# Altium PCB Thumb.PcbDoc (part 1 of 2)
Units mm, origin at the board's own origin, x right, y up, seen from the top; angles counter-clockwise.
Board outline 100.7 x 63.21 mm, 4 copper layers (Top Layer, Plane 1, Plane 2, Bottom Layer), stack 0.781 mm thick; 93 components, 47 nets, 311 pads, 257 vias.
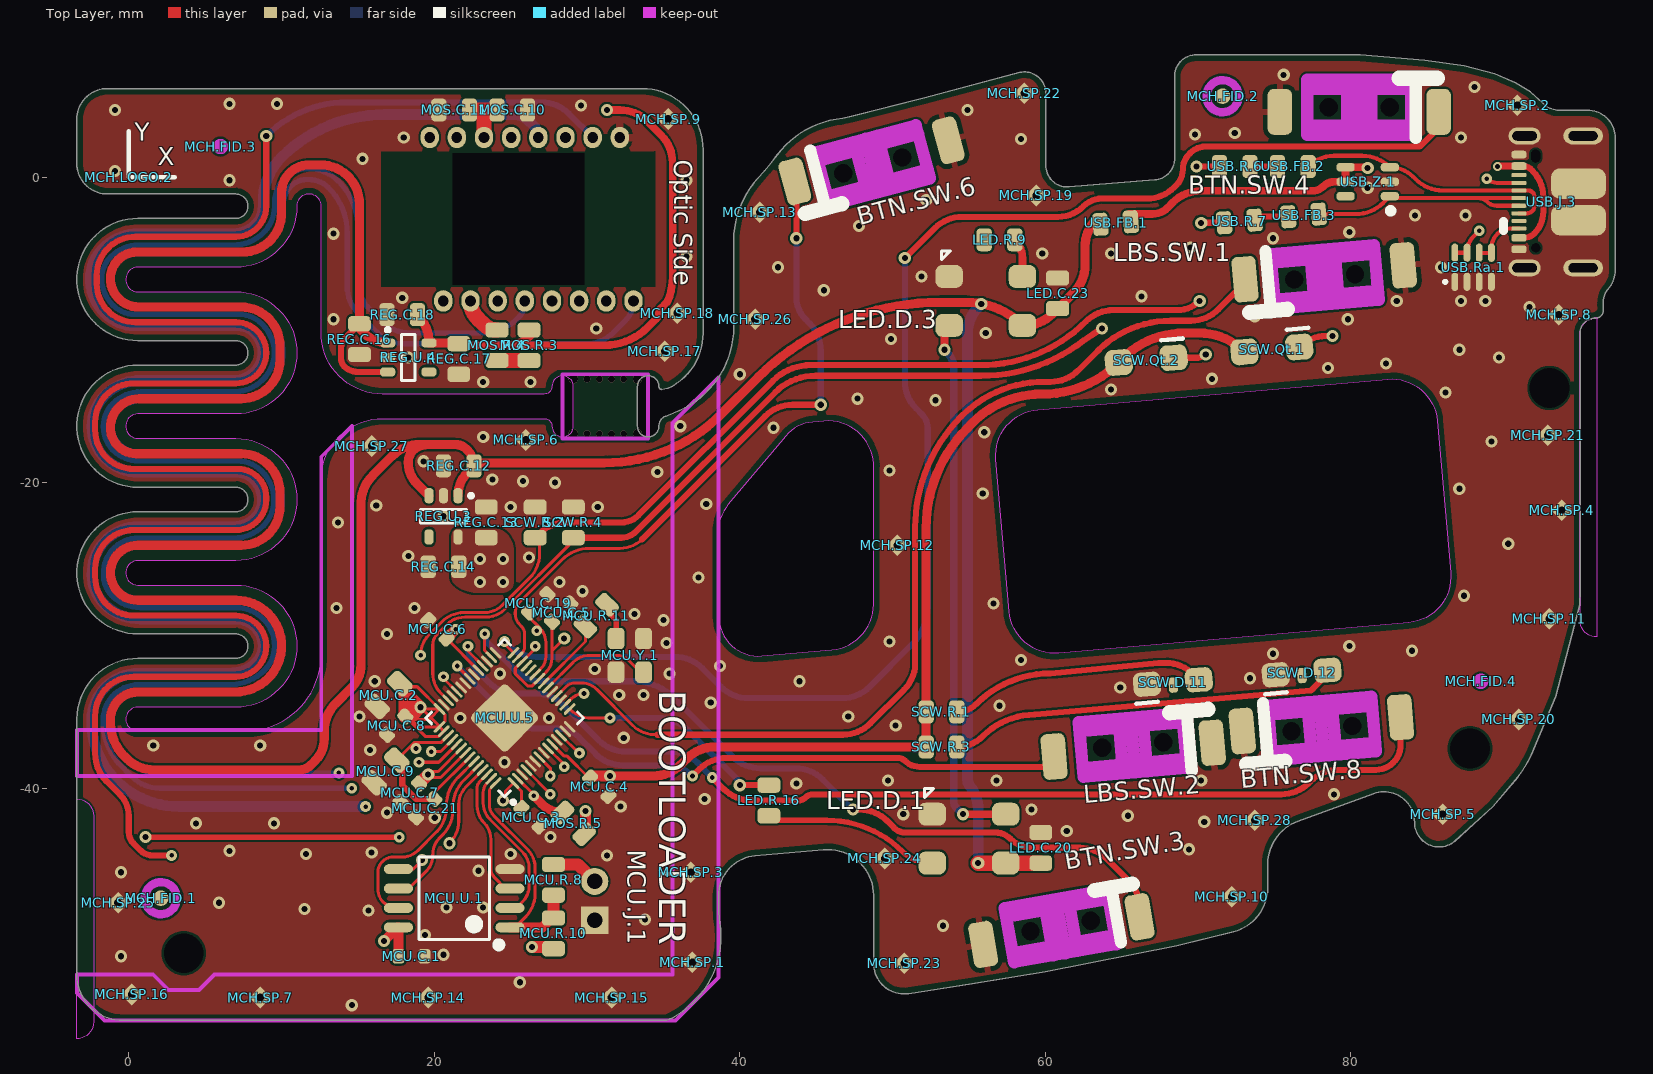
[diagram p0: Top Layer view]
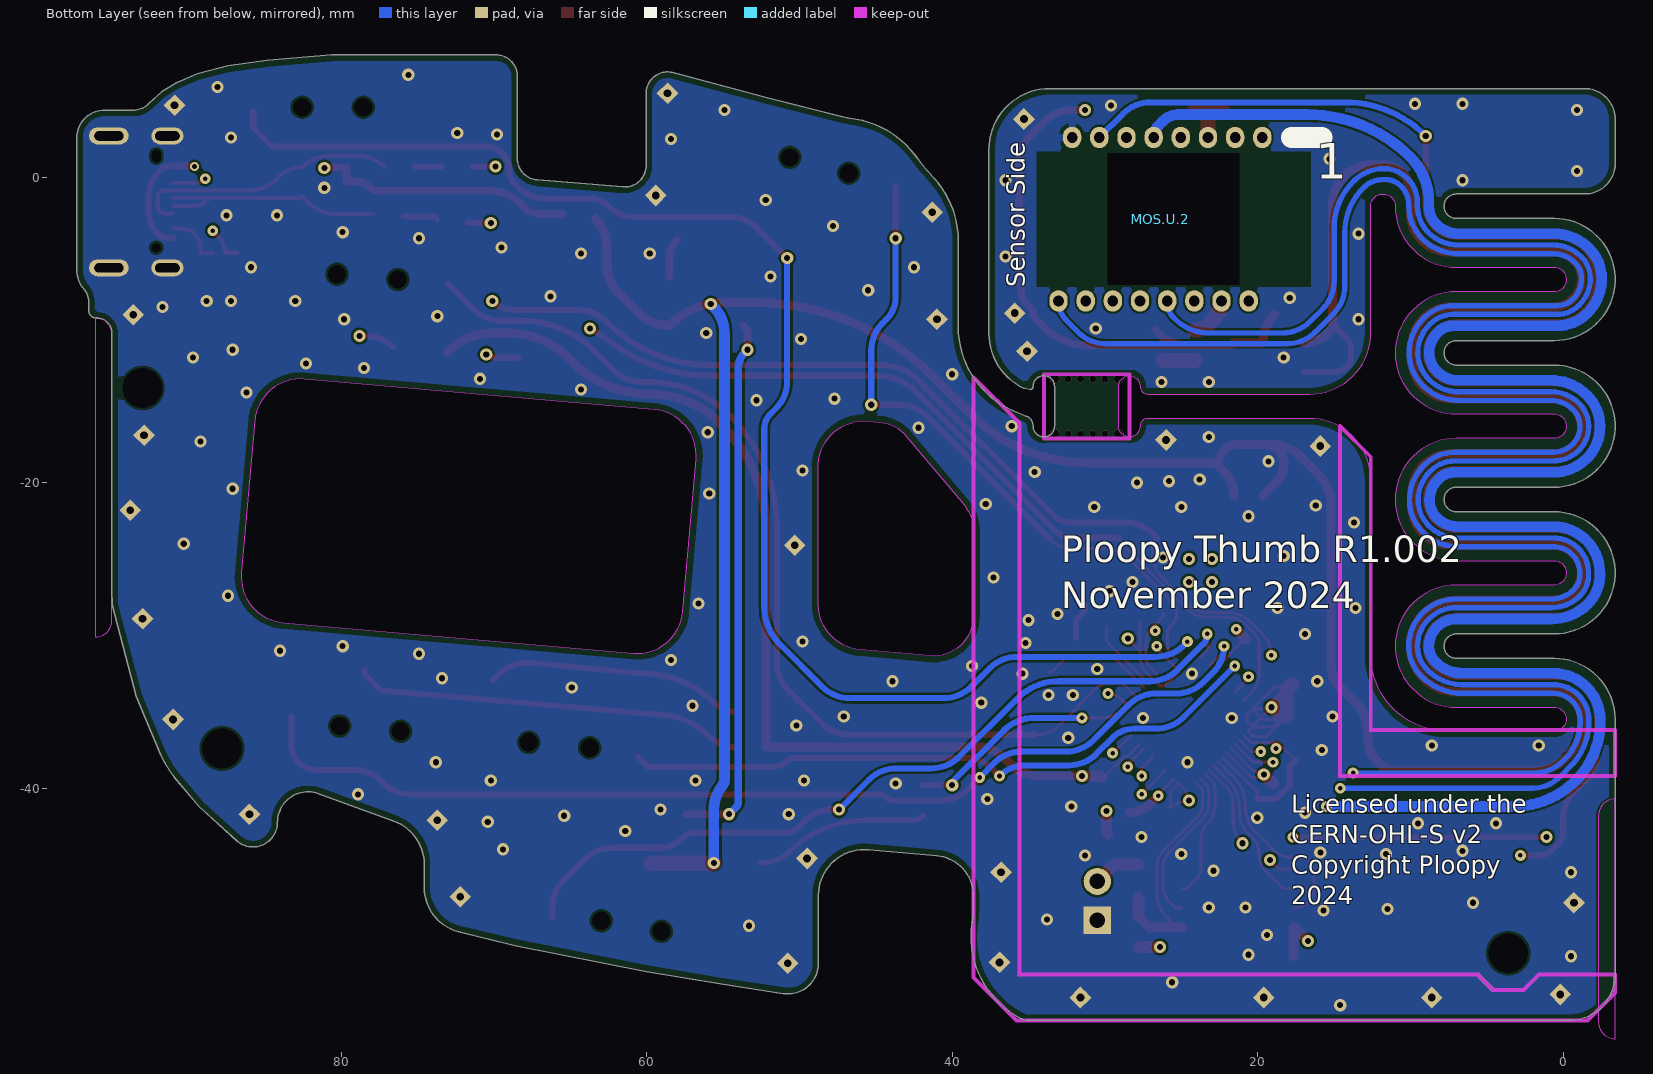
[diagram p1: Bottom Layer view, seen from below]
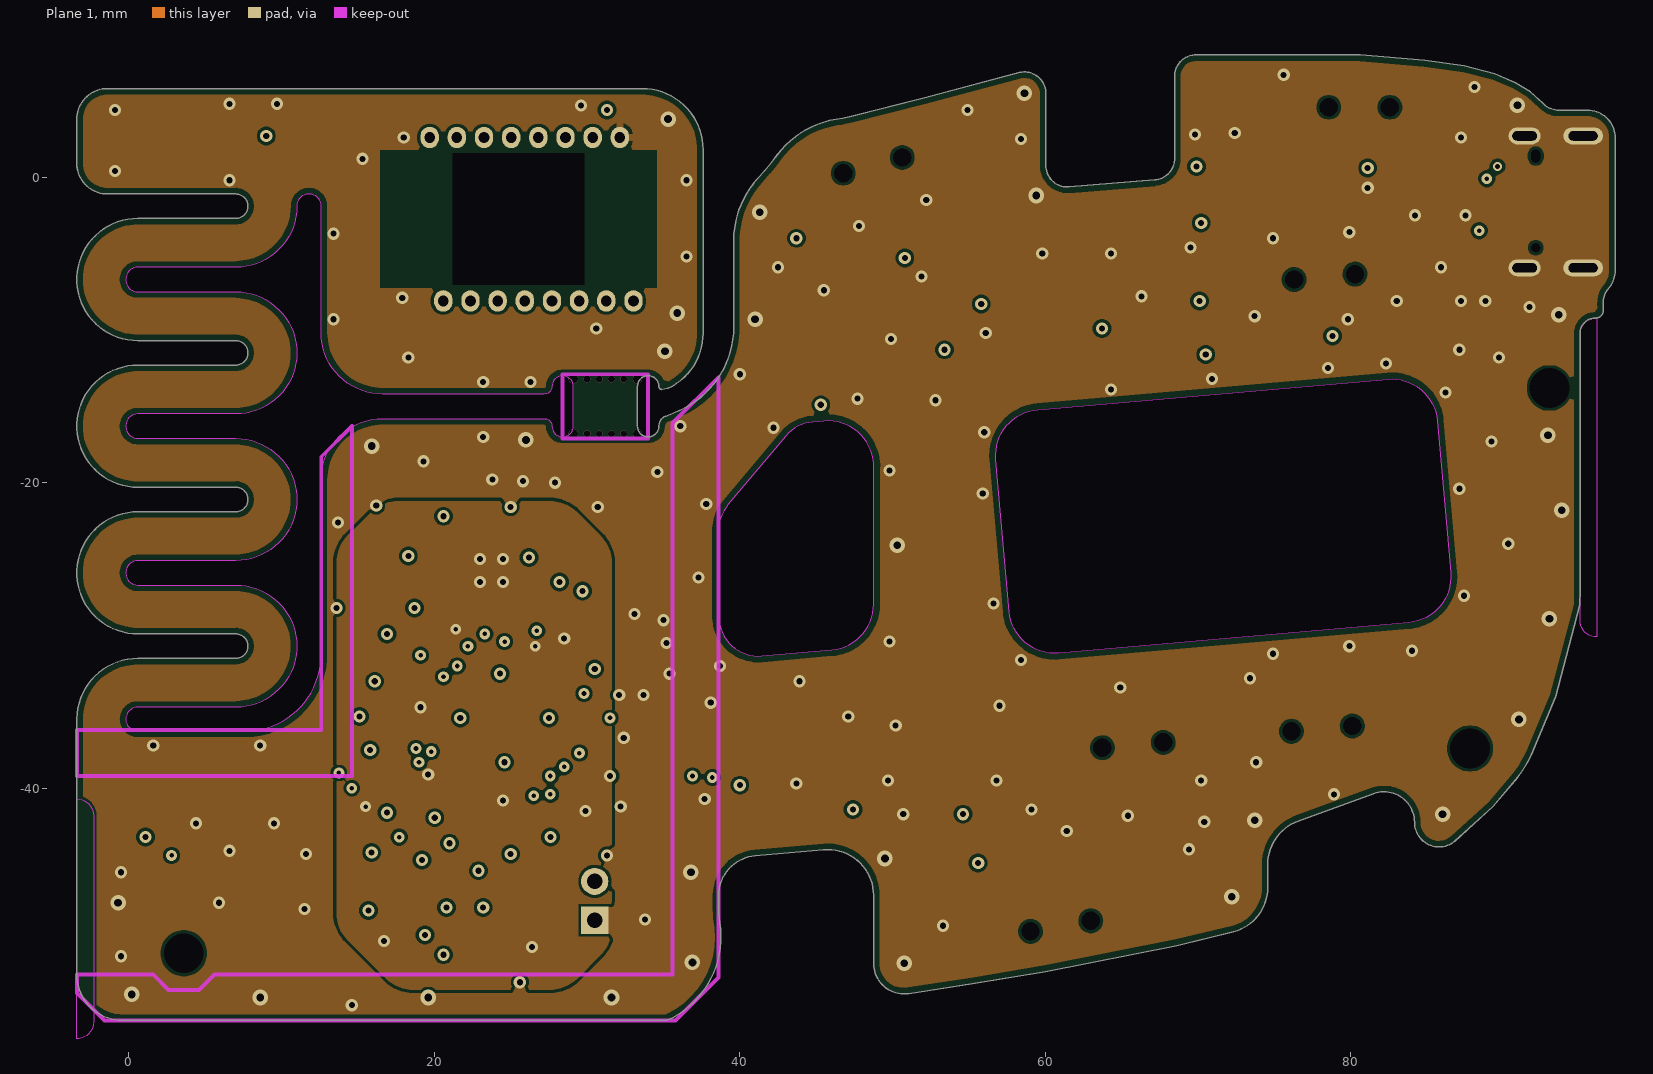
[diagram p2: Plane 1]
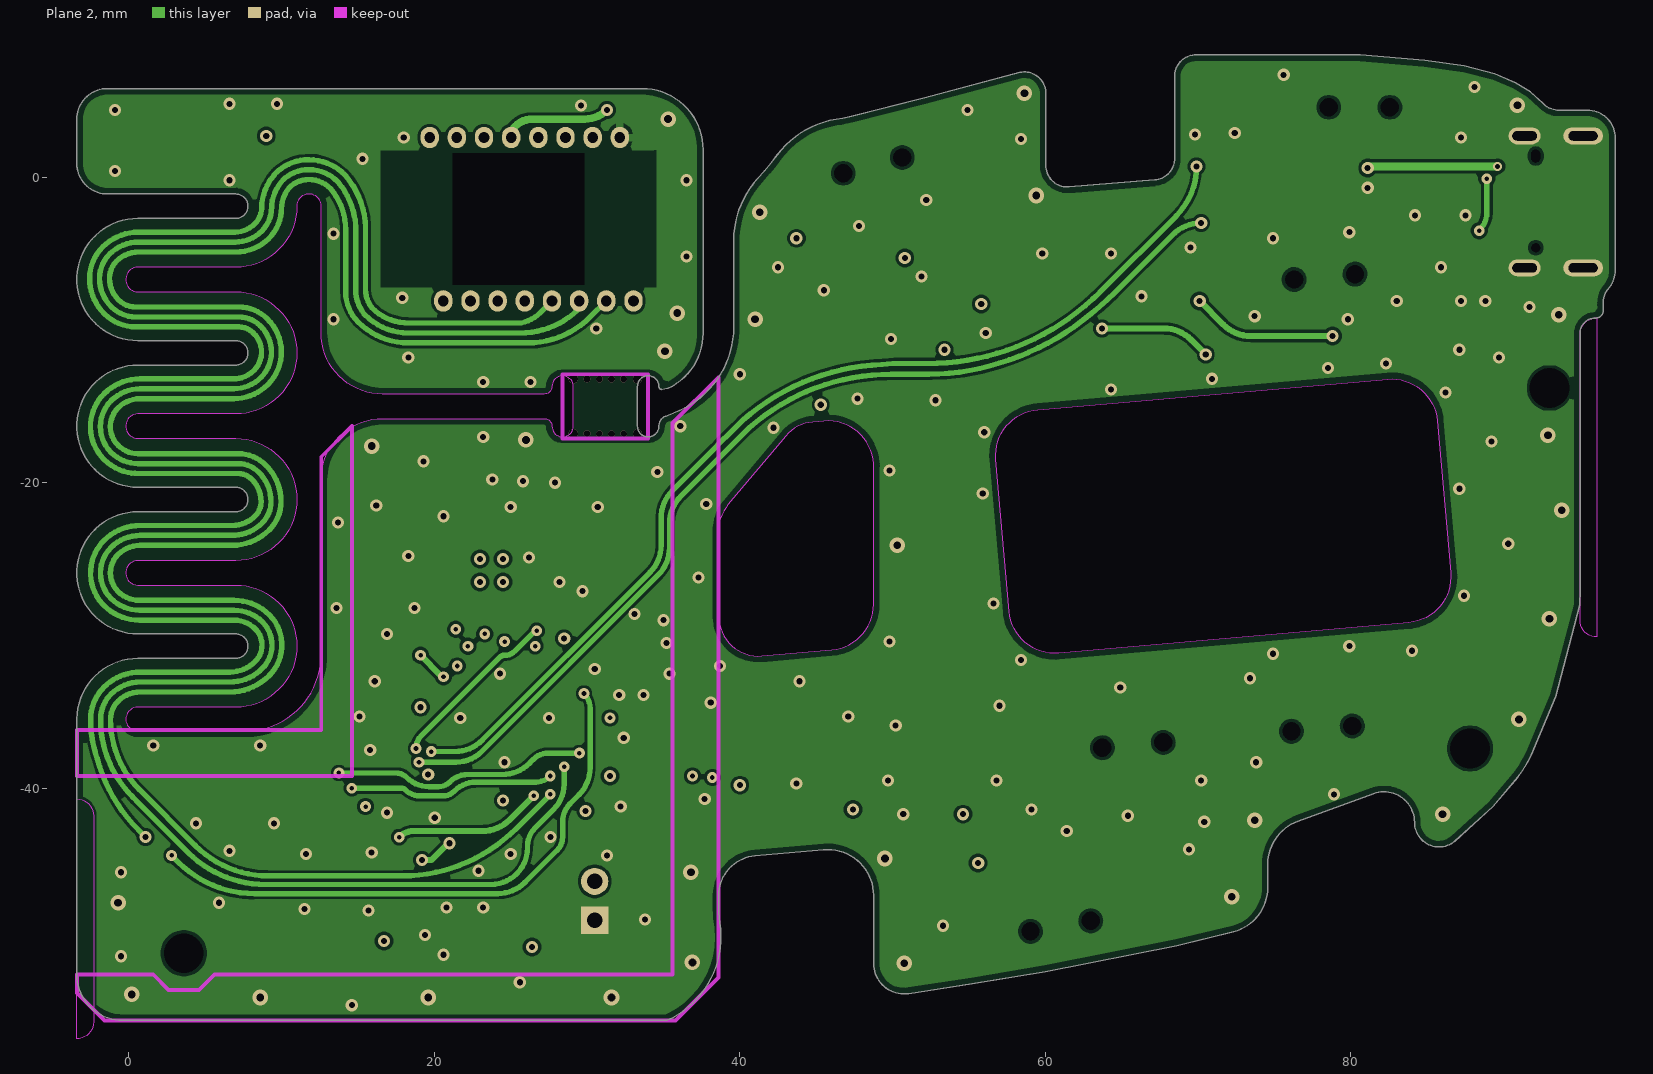
[diagram p3: Plane 2]

## Layer stack, top to bottom
Top Mask: solder mask 0.01, Solder Resist, Dk 3.5
Top Layer: signal copper 0.036
Dielectric 1: prepreg 0.127, FR-4, Dk 4.2
Plane 1: signal copper 0.036
Dielectric 4: core 0.383, Dk 4.2
Plane 2: signal copper 0.036
Dielectric 2: prepreg 0.127, Dk 4.2
Bottom Layer: signal copper 0.036
Bottom Solder: solder mask 0.01, Solder Resist, Dk 3.5

## Board outline
-3.4,-52.2 -3.4,-35.458 cw(c0.6,-35.5) 0.6,-31.5 7,-31.5 ccw(c7,-30.7) 7,-29.9 0.6,-29.9 cw(c0.6,-25.9) 0.6,-21.9 7,-21.9 ccw(c7,-21.1) 7,-20.3 0.6,-20.3 cw(c0.6,-16.3) 0.6,-12.3 7,-12.3 ccw(c7,-11.5) 7,-10.7 0.6,-10.7 cw(c0.6,-6.7) 0.6,-2.7 7,-2.7 ccw(c7,-1.9) 7,-1.1 -1.4,-1.1 cw(c-1.4,0.9) -3.4,0.9 -3.4,3.8 cw(c-1.4,3.8) -1.4,5.8 33.6,5.8 cw(c33.6,1.8) 37.6,1.8 37.6,-10.2 cw(c33.6,-10.2) 35.29,-13.825 34.9,-13.9 cw(c34.9,-13.7) 34.7,-13.7 ccw(c34,-13.7) 33.3,-13.7 33.3,-16.3 ccw(c34,-16.3) 34.7,-16.3 cw(c35.4,-16.3) 35.161,-15.642 35.652,-15.438 ccw(c33.6,-9.8) 39.6,-9.8 39.6,-4.133 cw(c45.6,-4.133) 41.163,-0.094 ccw(c25.205,14.432) 42.458,1.47 cw(c47.255,-2.134) 46.312,3.792 ccw(c41.671,32.949) 47.179,3.943 52.1,5.2 58.346,6.859 cw(c58.633,5.489) 60.033,5.489 60.033,0.761 ccw(c61.433,0.761) 61.548,-0.635 67.179,-0.172 ccw(c67.065,1.223) 68.465,1.223 68.465,6.608 cw(c69.865,6.608) 69.865,8.008 80.6,8.008 84.824,7.647 87.429,7.283 89.417,6.765 90.779,6.184 91.758,5.582 92.577,4.841 ccw(c93.609,5.786) 93.609,4.386 95.5,4.386 cw(c95.5,2.586) 97.3,2.586 97.3,-6.115 cw(c95.5,-6.115) 96.86,-7.294 ccw(c97.917,-8.212) 96.518,-8.252 96.53,-8.724 cw(c96.03,-8.724) 96.03,-9.224 96,-9.224 ccw(c96,-10.224) 95,-10.224 95,-27 94.994,-27.998 93.4,-34 91.816,-37.825 cw(c83.498,-33.708) 90.921,-39.279 89.3,-41.2 86.798,-43.466 cw(c85.77,-42.24) 84.17,-42.24 84.17,-42.235 ccw(c82.17,-42.235) 81.486,-40.355 76.538,-42.156 ccw(c77.564,-44.975) 74.564,-44.975 74.564,-46.487 cw(c71.564,-46.487) 72.323,-49.389 68.6,-50.3 60,-52 55.2,-52.8 51.052,-53.443 cw(c50.756,-51.465) 48.756,-51.465 48.756,-47.019 ccw(c45.756,-47.019) 45.494,-44.03 40.989,-44.425 ccw(c41.216,-47.015) 38.616,-47.015 38.616,-47.775 ccw(c45.416,-47.775) 38.696,-48.816 cw(c32.767,-49.735) 35.243,-55.2 -0.4,-55.2 cw(c-0.4,-52.2)
cut-out: -0.2,-35.475 ccw(c0.6,-35.45) 0.6,-36.25 7.6,-36.25 ccw(c7.6,-31.25) 12.6,-31.25 12.6,-19.8 cw(c16.6,-19.8) 16.6,-15.8 27.2,-15.8 cw(c27.2,-16.3) 27.7,-16.3 ccw(c28.4,-16.3) 29.1,-16.3 29.1,-13.7 ccw(c28.4,-13.7) 27.7,-13.7 cw(c27.2,-13.7) 27.2,-14.2 16.6,-14.2 cw(c16.6,-10.2) 12.6,-10.2 12.6,-1.9 ccw(c11.8,-1.9) 11,-1.9 cw(c7,-1.9) 7,-5.9 0.6,-5.9 ccw(c0.6,-6.7) 0.6,-7.5 7,-7.5 cw(c7,-11.5) 7,-15.5 0.6,-15.5 ccw(c0.6,-16.3) 0.6,-17.1 7,-17.1 cw(c7,-21.1) 7,-25.1 0.6,-25.1 ccw(c0.6,-25.9) 0.6,-26.7 7,-26.7 cw(c7,-30.7) 7,-34.7 0.6,-34.7 ccw(c0.6,-35.5)
cut-out: 38.616,-28.745 ccw(c41.216,-28.745) 41.443,-31.335 46.017,-30.935 ccw(c45.756,-27.946) 48.756,-27.947 48.763,-19.064 ccw(c45.765,-18.952) 45.504,-15.964 44.771,-16.028 ccw(c44.998,-18.618) 43.006,-16.947 39.224,-21.454 ccw(c41.216,-23.125) 38.616,-23.125
cut-out: 57.635,-28.433 56.764,-18.471 cw(c59.752,-18.21) 59.491,-15.221 82.403,-13.217 cw(c82.665,-16.205) 85.653,-15.944 86.525,-25.906 cw(c83.536,-26.167) 83.798,-29.156 60.885,-31.16 cw(c60.624,-28.172)

## Design rules (kind name [scope] priority, off if disabled: settings)
BoardOutlineClearance [(Not HasFootprint('SPARKGAP'))] p1: gap=0.4 ignorepadtopadclearanceinfootprint=FALSE except(0: Arc-SplitBarrior Arc-SplitContinuation Track-SplitBarrior Track-SplitContinuation Fill-SplitBarrior Fill-SplitContinuation Poly-SplitBarrior Poly-SplitContinuation Region-SplitBarrior Region-SplitContinuation Text-SplitBarrior Text-SplitContinuation)
Clearance "HighV Pads" [(InNetClass('HighV') AND (IsPad OR IsVia)) vs IsPad OR IsVia] p1: gap=0.4 ignorepadtopadclearanceinfootprint=FALSE except(0: Arc-Hole Track-Hole SMDPad-Hole THPad-Hole Via-Hole Fill-Hole Poly-Hole Region-Hole Text-Hole) // Establishes minimum clearance between bare pads that are high voltage, per IPC2221A Table 6-1, 51-100V, condition A6
Clearance Inter-Pad [IsPad vs IsPad] p2: gap=0.15 ignorepadtopadclearanceinfootprint=FALSE
Clearance "Spark Gaps" [InNetClass('Spark Gap') vs InNet('GND') And InPoly] p3: gap=0.635 ignorepadtopadclearanceinfootprint=FALSE except(0: Arc-Hole Track-Hole SMDPad-Hole THPad-Hole Via-Hole Fill-Hole Poly-Hole Region-Hole Text-Hole)
Clearance FIDs [Name like 'FID*'] p4: gap=1.016 ignorepadtopadclearanceinfootprint=FALSE except(0: Arc-Hole Track-Hole SMDPad-Hole THPad-Hole Via-Hole Fill-Hole Poly-Hole Region-Hole Text-Hole)
Clearance "Inner Planes" [InPoly AND OnMid] p5: gap=0.2 ignorepadtopadclearanceinfootprint=FALSE // Defines a larger clearance for planes on inner layers.
Clearance "All Planes" [InPoly] p6: gap=0.15 ignorepadtopadclearanceinfootprint=FALSE // Defines minimum clearance between planes on the same layer.
Clearance "Inner Layer Clearance" [OnMid vs OnMid] p7: gap=0.15 ignorepadtopadclearanceinfootprint=FALSE // We will give inner layers more spacing because they tend to be subject to stricter process limits.
Clearance [All] p8: gap=0.1 ignorepadtopadclearanceinfootprint=FALSE // 2 oz (70um) boards require at least 10mil spacing. We give a bit more to make sure things work well.
ComponentClearance "Terminal Block" [(HasFootprint('Phoenix 1933189 - Header')) vs (HasFootprint('Phoenix 1933189 - Header'))] p1: gap=-2.286 collisioncheckmode=3 verticalgap=0.254 showdistances=FALSE
ComponentClearance "FET/TP self Clearance" [(Name like 'Q*') Or (Name like 'TP*') vs (Name like 'Q*') Or (Name like 'TP*')] p2: gap=0.254 collisioncheckmode=3 verticalgap=0.254 showdistances=FALSE
ComponentClearance [Not ((Name like 'H*') Or (Name like 'FID*') Or (Name like 'SP*')) vs Not ((Name like 'H*') Or (Name like 'FID*') Or (Name like 'SP*'))] p3: gap=0.5 collisioncheckmode=3 verticalgap=0.5 showdistances=FALSE
DiffPairsRouting [All] p1: maxlimit=0.254 minlimit=0.254 mostfreqgap=0.254 toplayer_minwidth=0.381 toplayer_maxwidth=0.381 toplayer_prefwidth=0.381 midlayer2_minwidth=0.381 midlayer2_maxwidth=0.381 midlayer2_prefwidth=0.381 midlayer3_minwidth=0.381 midlayer3_maxwidth=0.381 midlayer3_prefwidth=0.381 bottomlayer_minwidth=0.381 bottomlayer_maxwidth=0.381 bottomlayer_prefwidth=0.381 substack1={D919DD2D-F60F-4B9F-B5AE-F3E69D6E268F} toplayer_{d919dd2d-f60f-4b9f-b5ae-f3e69d6e268f}_minwidth=0.381 toplayer_{d919dd2d-f60f-4b9f-b5ae-f3e69d6e268f}_maxwidth=0.381 toplayer_{d919dd2d-f60f-4b9f-b5ae-f3e69d6e268f}_prefwidth=0.381 midlayer2_{d919dd2d-f60f-4b9f-b5ae-f3e69d6e268f}_minwidth=0.381 midlayer2_{d919dd2d-f60f-4b9f-b5ae-f3e69d6e268f}_maxwidth=0.381 midlayer2_{d919dd2d-f60f-4b9f-b5ae-f3e69d6e268f}_prefwidth=0.381 midlayer3_{d919dd2d-f60f-4b9f-b5ae-f3e69d6e268f}_minwidth=0.381 midlayer3_{d919dd2d-f60f-4b9f-b5ae-f3e69d6e268f}_maxwidth=0.381 midlayer3_{d919dd2d-f60f-4b9f-b5ae-f3e69d6e268f}_prefwidth=0.381 bottomlayer_{d919dd2d-f60f-4b9f-b5ae-f3e69d6e268f}_minwidth=0.381 bottomlayer_{d919dd2d-f60f-4b9f-b5ae-f3e69d6e268f}_maxwidth=0.381 bottomlayer_{d919dd2d-f60f-4b9f-b5ae-f3e69d6e268f}_prefwidth=0.381 maxuncoupledlength=12.7
Height [All] p1: minheight=0 maxheight=41 prefheight=12.7
HoleSize [All] p1: absolutevalues=TRUE maxlimit=100 minlimit=0.3 maxpercent=80.000 minpercent=20.000
HoleToHoleClearance [All] p1: gap=0.6 allowstackedmicrovias=TRUE
LayerPairs [All] p1: enforce=FALSE
MinimumSolderMaskSliver [All] p1: minsoldermaskwidth=0.09
NetAntennae [Not (HasFootprint('BALANCE_RESISTOR'))] p1: netantennaetolerance=0
PasteMaskExpansion [All] p1: expansion=-0.025
PlaneClearance [All] p1: clearance=0.3
PlaneConnect [All] p1: pad.planeconnectstyle=Relief pad.reliefexpansion=0.5 pad.reliefentries=4 pad.reliefconductorwidth=0.5 pad.reliefairgap=0.25 via.planeconnectstyle=Direct via.reliefexpansion=0.5 via.reliefentries=4 via.reliefconductorwidth=0.5 via.reliefairgap=0.25
PolygonConnect "PolygonConnect Spark Gap" [HasFootprint('SparkGap')] p1: connectstyle=Direct reliefconductorwidth=0.254 reliefentries=4 polygonreliefangle="90 Angle" airgapwidth=0.254 // This rule makes it so spark gaps get direct connections to ground planes.
PolygonConnect PolygonConnect_GND [All vs InNet('GND')] p2: connectstyle=Direct reliefconductorwidth=0.5 reliefentries=4 polygonreliefangle="90 Angle" airgapwidth=0.25 // This rule specifies all vias and holes connected to a GND plane have direct connections.
PolygonConnect [All] p3: connectstyle=Direct reliefconductorwidth=0.5 reliefentries=4 polygonreliefangle="90 Angle" airgapwidth=0.25
RoutingVias [All] p1: holewidth=0.5 width=1 viastyle="Through Hole" minholewidth=0.2 minwidth=0.5 maxholewidth=6 maxwidth=10
ShortCircuit [Not (InPadClass('TraceResistorPads')) vs Not (InPadClass('TraceResistorPads'))] p1: allowed=FALSE
SilkToBoardRegionClearance [All] p1 off:
SilkToSilkClearance [All] p1 off: silktosilkclearance=0.254
SilkToSolderMaskClearance SilkscreenOverComponentPads [IsPad] p1: minsilkscreentomaskgap=0.102 clearancetoexposedcopper=FALSE
SolderMaskExpansion SolderMaskExpansion_via [IsVia] p1: expansion=0.102 istentingtop=TRUE
SolderMaskExpansion [All] p2: expansion=0.076 istentingtop=FALSE
Width [All] p1: maxlimit=50.8 minlimit=0.1 preferedwidth=0.4 midlayer2_minwidth=0.35 midlayer3_minwidth=0.35 bottomlayer_minwidth=0.26 substack1={D919DD2D-F60F-4B9F-B5AE-F3E69D6E268F} minimp=50.000000 maximp=50.000000 favimp=50.000000
15 further rules are at their usual default settings.

## Classes and differential pairs
component class SCW: SCW.D.11 SCW.D.12 SCW.Qt.1 SCW.Qt.2 SCW.R.1 SCW.R.2 SCW.R.3 SCW.R.4
component class LED: LED.C.20 LED.C.23 LED.D.1 LED.D.3 LED.R.9 LED.R.16
component class BTN: BTN.SW.3 BTN.SW.4 BTN.SW.6 BTN.SW.8 LBS.SW.1 LBS.SW.2
component class USB: USB.FB.1 USB.FB.2 USB.FB.3 USB.J.3 USB.R.6 USB.R.7 USB.Ra.1 USB.Z.1
component class REG: REG.C.12 REG.C.13 REG.C.14 REG.C.16 REG.C.17 REG.C.18 REG.U.3 REG.U.4
component class MOS: MOS.C.10 MOS.C.11 MOS.R.3 MOS.R.4 MOS.R.5 MOS.U.2
component class MCU: MCU.C.1 MCU.C.2 MCU.C.3 MCU.C.4 MCU.C.5 MCU.C.6 MCU.C.7 MCU.C.8 MCU.C.9 MCU.C.19 MCU.C.21 MCU.J.1 MCU.R.8 MCU.R.10 MCU.R.11 MCU.U.1 MCU.U.5 MCU.Y.1
component class MCH: MCH.FID.1 MCH.FID.2 MCH.FID.3 MCH.FID.4 MCH.LOGO.2 MCH.SP.1 MCH.SP.2 MCH.SP.3 MCH.SP.4 MCH.SP.5 MCH.SP.6 MCH.SP.7 MCH.SP.8 MCH.SP.9 MCH.SP.10 MCH.SP.11 MCH.SP.12 MCH.SP.13 MCH.SP.14 MCH.SP.15 MCH.SP.16 MCH.SP.17 MCH.SP.18 MCH.SP.19 MCH.SP.20 MCH.SP.21 MCH.SP.22 MCH.SP.23 MCH.SP.24 MCH.SP.25 MCH.SP.26 MCH.SP.27 MCH.SP.28

## Components (designator, comment, footprint, x,y, rotation, side; value= is the part's Value field where it differs from the comment)
BTN.SW.3 "D2LS-21" D2LS-21 61,-49.025 r190 top (schematic designator SW3)
BTN.SW.4 "D2LS-21" D2LS-21 80.55,4.575 r180 top (schematic designator SW4)
BTN.SW.6 "D2LS-21" D2LS-21 48.7,0.775 r15 top (schematic designator SW6)
BTN.SW.8 "D2LS-21" D2LS-21 78.1,-36.1 r5 top (schematic designator SW8)
LBS.SW.1 "D2LS-21" D2LS-21 78.275,-6.525 r5 top (schematic designator SW1)
LBS.SW.2 "D2LS-21" D2LS-21 65.725,-37.175 r185 top (schematic designator SW2)
LED.C.20 "0805" 0805 59.7,-43.9 r0 top value="0.1uF 100V" (schematic designator C20)
LED.C.23 "0805" 0805 60.8,-7.6 r0 top value="0.1uF 100V" (schematic designator C23)
LED.D.1 "IN-PI55TATPRPGPB" IN-PI55TATPRPGPB 55,-43.3 r180 top (schematic designator D1)
LED.D.3 "IN-PI55TATPRPGPB" IN-PI55TATPRPGPB 56.1,-8.1 r180 top (schematic designator D3)
LED.R.9 "0805" 0805 57,-4.1 r90 top value="1k 1%" (schematic designator R9)
LED.R.16 "0805" 0805 41.9,-40.8 r180 top value="1k 1%" (schematic designator R16)
MCH.FID.1 "IPC-7351 Fiducial 1mm" FIDUCIAL_1.5 2.1,-47.2 r90 top (schematic designator FID1)
MCH.FID.2 "IPC-7351 Fiducial 1mm" FIDUCIAL_1.5 71.6,5.3 r90 top (schematic designator FID2)
MCH.FID.3 "1mm Fiducial for OpenPNP" FIDUCIAL-NEW 6,2 r90 top (schematic designator FID3)
MCH.FID.4 "1mm Fiducial for OpenPNP" FIDUCIAL-NEW 88.5,-33 r90 top (schematic designator FID4)
MCH.LOGO.2 "Coordinate system marker for assembly" "Coordinate System" 0,0 r0 top (schematic designator LOGO2)
MCH.SP.1 "Spark Gap" SparkGap 36.9,-51.4 r90 top (schematic designator SP1)
MCH.SP.2 "Spark Gap" SparkGap 90.9,4.7 r90 top (schematic designator SP2)
MCH.SP.3 "Spark Gap" SparkGap 36.8,-45.5 r90 top (schematic designator SP3)
MCH.SP.4 "Spark Gap" SparkGap 93.8,-21.8 r90 top (schematic designator SP4)
MCH.SP.5 "Spark Gap" SparkGap 86,-41.7 r90 top (schematic designator SP5)
MCH.SP.6 "Spark Gap" SparkGap 26,-17.2 r90 top (schematic designator SP6)
MCH.SP.7 "Spark Gap" SparkGap 8.6,-53.7 r90 top (schematic designator SP7)
MCH.SP.8 "Spark Gap" SparkGap 93.6,-9 r90 top (schematic designator SP8)
MCH.SP.9 "Spark Gap" SparkGap 35.3,3.8 r90 top (schematic designator SP9)
MCH.SP.10 "Spark Gap" SparkGap 72.2,-47.1 r90 top (schematic designator SP10)
MCH.SP.11 "Spark Gap" SparkGap 93,-28.9 r90 top (schematic designator SP11)
MCH.SP.12 "Spark Gap" SparkGap 50.3,-24.1 r90 top (schematic designator SP12)
MCH.SP.13 "Spark Gap" SparkGap 41.3,-2.3 r90 top (schematic designator SP13)
MCH.SP.14 "Spark Gap" SparkGap 19.6,-53.7 r90 top (schematic designator SP14)
MCH.SP.15 "Spark Gap" SparkGap 31.6,-53.7 r90 top (schematic designator SP15)
MCH.SP.16 "Spark Gap" SparkGap 0.2,-53.5 r90 top (schematic designator SP16)
MCH.SP.17 "Spark Gap" SparkGap 35.1,-11.4 r90 top (schematic designator SP17)
MCH.SP.18 "Spark Gap" SparkGap 35.9,-8.9 r90 top (schematic designator SP18)
MCH.SP.19 "Spark Gap" SparkGap 59.4,-1.2 r90 top (schematic designator SP19)
MCH.SP.20 "Spark Gap" SparkGap 91,-35.5 r90 top (schematic designator SP20)
MCH.SP.21 "Spark Gap" SparkGap 92.9,-16.9 r90 top (schematic designator SP21)
MCH.SP.22 "Spark Gap" SparkGap 58.633,5.489 r90 top (schematic designator SP22)
MCH.SP.23 "Spark Gap" SparkGap 50.756,-51.465 r90 top (schematic designator SP23)
MCH.SP.24 "Spark Gap" SparkGap 49.5,-44.6 r90 top (schematic designator SP24)
MCH.SP.25 "Spark Gap" SparkGap -0.7,-47.5 r90 top (schematic designator SP25)
MCH.SP.26 "Spark Gap" SparkGap 41,-9.3 r90 top (schematic designator SP26)
MCH.SP.27 "Spark Gap" SparkGap 15.9,-17.6 r90 top (schematic designator SP27)
MCH.SP.28 "Spark Gap" SparkGap 73.7,-42.1 r90 top (schematic designator SP28)
MCU.C.1 "0603 X5R" "0603 capacitor - CAPC1608X06N" 18.5,-51 r90 top value="0.1uF 25V" (schematic designator C1)
MCU.C.2 "0805 X5R" "0805 - TALL" 17,-33.9 r135 top value="1uF 25V" (schematic designator C2)
MCU.C.3 "0603 X5R" "0603 capacitor - CAPC1608X06N" 26.3,-41.9 r45 top value="0.1uF 25V" (schematic designator C3)
MCU.C.4 "0603 X5R" "0603 capacitor - CAPC1608X06N" 30.8,-39.9 r45 top value="0.1uF 25V" (schematic designator C4)
MCU.C.5 "0603 X5R" "0603 capacitor - CAPC1608X06N" 28.3,-28.5 r135 top value="0.1uF 25V" (schematic designator C5)
MCU.C.6 "0603 X5R" "0603 capacitor - CAPC1608X06N" 20.2,-29.6 r225 top value="0.1uF 25V" (schematic designator C6)
MCU.C.7 "0603 X5R" "0603 capacitor - CAPC1608X06N" 18.4,-40.3 r315 top value="0.1uF 25V" (schematic designator C7)
MCU.C.8 "0603 X5R" "0603 capacitor - CAPC1608X06N" 17.5,-35.9 r315 top value="0.1uF 25V" (schematic designator C8)
MCU.C.9 "0805 X5R" "0805 - TALL" 16.8,-38.9 r135 top value="1uF 25V" (schematic designator C9)
MCU.C.19 "0603 X5R" "0603 capacitor - CAPC1608X06N" 26.8,-27.9 r135 top value="0.1uF 25V" (schematic designator C19)
MCU.C.21 "0603 X5R" "0603 capacitor - CAPC1608X06N" 19.4,-41.3 r315 top value="0.1uF 25V" (schematic designator C21)
MCU.J.1 "HEADER2" 2x1 30.5,-48.64 r180 top (schematic designator J1)
MCU.R.8 "0805" 0805 27.8,-46 r0 top value="1k 1%" (schematic designator R8)
MCU.R.10 "0805" 0805 27.8,-49.5 r180 top value="10k 1%" (schematic designator R10)
MCU.R.11 "0805" 0805 30.6,-28.7 r135 top value="1k 1%" (schematic designator R11)
MCU.U.1 "W25Q16JVSSIQ" "W25Q128JVS - SOIC127P790X216-8M" 21.3,-47.2 r180 top (schematic designator U1)
MCU.U.5 "RP2040" "RP2040 - QFN40P700X700X90_HS-57M" 24.6,-35.4 r135 top (schematic designator U5)
MCU.Y.1 "RH100-12.000-16-3030" RH100-12.000-16-3030 32.8,-31.3 r90 top (schematic designator Y1)
MOS.C.10 "0805" 0805 25.1,4.4 r270 top value="10uF 25V" (schematic designator C10)
MOS.C.11 "0805" 0805 21.3,4.4 r90 top value="0.1uF 100V" (schematic designator C11)
MOS.R.3 "0805" 0805 26.2,-11 r180 top value="22R 1%" (schematic designator R3)
MOS.R.4 "0805" 0805 24.1,-11 r0 top value="22R 1%" (schematic designator R4)
MOS.R.5 "0805" 0805 29.1,-42.3 r45 top value="10k 1%" (schematic designator R5)
MOS.U.2 "PMW3360DM-T2QU" PMW3360DM-T2QU 19.7,2.6 r180 bottom locked (schematic designator U2)
REG.C.12 "0805" 0805 21.6,-18.9 r90 top value="1uF 25V" (schematic designator C12)
REG.C.13 "0805" 0805 23.4,-22.6 r0 top value="10uF 25V" (schematic designator C13)
REG.C.14 "0805" 0805 20.6,-25.5 r90 top value="1uF 25V" (schematic designator C14)
REG.C.16 "0805" 0805 15.1,-10.6 r180 top value="1uF 25V" (schematic designator C16)
REG.C.17 "0805" 0805 21.6,-11.9 r180 top value="10uF 25V" (schematic designator C17)
REG.C.18 "0805" 0805 17.9,-9 r90 top value="1uF 25V" (schematic designator C18)
REG.U.3 "AP2202K-3.3" "AP2202 - SOT95P270X145-5N" 20.6,-22.2 r270 top (schematic designator U3)
REG.U.4 "AP2204K-1.8" "AP2202 - SOT95P270X145-5N" 18.3,-11.8 r0 top (schematic designator U4)
SCW.D.11 "IR12-21C/TR8 or VSMB10940" IR12-21C/TR8 68.35,-33.05 r275 top (schematic designator D11)
SCW.D.12 "IR12-21C/TR8 or VSMB10940" IR12-21C/TR8 76.775,-32.425 r275 top (schematic designator D12)
SCW.Qt.1 "PT26-51B/TR8 or PT12-21B/TR8" PT26-51B/TR8 74.825,-11.275 r95 top (schematic designator Qt1)
SCW.Qt.2 "PT26-51B/TR8 or PT12-21B/TR8" PT26-51B/TR8 66.6,-11.975 r95 top (schematic designator Qt2)
SCW.R.1 "0805" 0805 53.2,-35 r270 top value="100R 1%" (schematic designator R1)
SCW.R.2 "0805" 0805 26.6,-22.6 r0 top value="1k 1%" (schematic designator R2)
SCW.R.3 "0805" 0805 53.2,-37.3 r270 top value="100R 1%" (schematic designator R3)
SCW.R.4 "0805" 0805 29.1,-22.6 r0 top value="1k 1%" (schematic designator R4)
USB.FB.1 "ACML-0805-601-T" 0805 64.6,-3 r275 top (schematic designator FB1)
USB.FB.2 "ACML-0805-601-T" 0805 76.2,0.7 r270 top (schematic designator FB2)
USB.FB.3 "ACML-0805-601-T" 0805 76.9,-2.5 r275 top (schematic designator FB3)
USB.J.3 "DX07S016JA1R1500" DX07S016JA1R1500 94,-1.62 r90 top locked (schematic designator J3)
USB.R.6 "0805" 0805 72.4,0.7 r270 top value="22R 1%" (schematic designator R6)
USB.R.7 "0805" 0805 72.7,-2.9 r275 top value="22R 1%" (schematic designator R7)
USB.Ra.1 "1206 Quad" "4x 10k 1% - CAC-80P320X160-8M" 88,-5.9 r90 top value="10k 1%" (schematic designator Ra1)
USB.Z.1 "IP4220CZ6,125" "PESD3V3S4UD - SOT95P275X110-6N" 81.1,-0.3 r180 top (schematic designator Z1)

## Footprints (in the part's own frame and the unit in brackets; to place one, negate y for a bottom-side part, rotate by r counter-clockwise, add the part's x,y. Pads: shape width x height; smd on the part's side, far side on the other; paste and mask are expansions set on the pad)
2x1 [mil]
  rect 70x70 hole 40 paste-3897.64: 1(0,0)
  round 70 hole 40 paste-3897.64: 2(0,-100)
  body extent -50,-150 50,50, height 339
"4x 10k 1% - CAC-80P320X160-8M" [mm] "Chip Array, Concave, 8-Leads, Pitch 0.80mm,  Body 3.20x1.60mm,  IPC Low Density"
  oval 1.2x0.45 smd paste-99: 1(-0.95,1.2) 2(-0.95,0.4) 3(-0.95,-0.4) 4(-0.95,-1.2) 5(0.95,-1.2) 6(0.95,-0.4) 7(0.95,0.4) 8(0.95,1.2)
  silkscreen extent -1,1.78 -0.9,1.87, body extent -0.9,-1.7 0.9,1.7, height 0.6
"0603 capacitor - CAPC1608X06N" [mm] "Chip Capacitor, 2-Leads, Body 1.60x0.80mm, IPC Medium Density"
  rrect50% 0.95x0.8 smd: 1(0,-0.85) 2(0,0.85)
  body extent -0.45,-0.85 0.45,0.85, height 0.6
0805 [mm] "Chip Capacitor, 2-Leads, Body 2.0x1.3mm, IPC Medium Density"
  rrect50% 1.5x1 smd paste+0: 1(0,1.002) 2(0,-1.002)
  body extent -0.72,-1.1 0.72,1.1, height 0.8
"0805 - TALL" [mm] "Same as 0805 footprint, but solder mask is adjusted to leave more paste behind for tall (>0.9mm) components like big caps, which tend to be solder-starved on the regular footprint."
  rrect50% 1.6x1.1 smd paste+0: 1(0,1.052) 2(0,-1.052)
  body extent -0.72,-1.1 0.73,1.1, height 0.8
"AP2202 - SOT95P270X145-5N" [mm] "SOT23, 5-Leads, Body 2.92x2.70mm, Pitch 0.95mm, IPC Medium Density"
  rrect80% 1x0.6 smd paste-0.04: 1(-1.35,0.95) 2(-1.35,0) 3(-1.35,-0.95) 4(1.35,-0.95) 5(1.35,0.95)
  silkscreen extent -1.47,-1.5 0.45,1.93, body extent -0.85,-1.52 0.85,1.52, height 1.45
"Coordinate System" [mm]
  silkscreen extent 0,0 3,3
D2LS-21 [mm]
  rrect50% 1.6x3 smd paste-0.04: A(-5.2,0.3) B(5.2,0.3)
  round 0 hole 1.2 unplated: ""(-2,0) ""(2,0)
  Top Layer keep-out lines w0.8: 3.4,-1.2 -3.4,-1.2 ; 3.4,1.2 -3.4,1.2 ; 0.8,-1.7 0.8,1.8 ; 0,-1.7 0,1.8 ; -0.8,-1.8 -0.8,1.8 ; 3.4,-1.8 3.4,1.8 -3.4,1.8 -3.4,-1.8 3.4,-1.8
  silkscreen extent -5.1,-2 -2.6,1.74, body extent -5.6,-2.4 5.6,2.4, height 3.19
DX07S016JA1R1500 [mm] "USB-C (USB TYPE-C) USB 2.0 Receptacle Connector 24 (16+8 Dummy) Position Surface Mount, Right Angle; Through Hole"
  rrect70% 0.5x1 smd paste-0.04 mask+0.05: 1(-3.1,3) 2(-2.35,3) 11(2.35,3) 12(3.1,3)
  rrect70% 0.27x1 smd paste-0.02 mask+0.05: 3(-1.75,3) 4(-1.25,3) 5(-0.75,3) 6(-0.25,3) 7(0.25,3) 8(0.75,3) 9(1.25,3) 10(1.75,3)
  rrect100% 1.1x2.6 hole 0.6 slot 1.9 at 90 deg paste-99 mask+0.1: SHELL(-4.32,-1.2) SHELL(4.32,-1.2)
  rrect100% 1.1x2.1 hole 0.6 slot 1.6 at 90 deg paste-99 mask+0.1: SHELL(-4.32,2.625) SHELL(4.32,2.625)
  rrect60% 2x3.6 smd paste-0.12 mask+0.05: SHELL(-1.2,-0.9) SHELL(1.2,-0.9)
  round 0 hole 0.6: ""(-3,1.9)
  round 0 hole 0.6 slot 0.85 at 0 deg: ""(3,1.9)
  body extent -4.47,-3.65 4.47,3.25, height 3.18
FIDUCIAL-NEW [mm]
  Top Layer keep-out circle w0.6: c0,0 r0.2
FIDUCIAL_1.5 [mil]
  round 40 smd paste-60 mask+30: 1(0,0)
  Top Layer keep-out circle w21.65: c0,0 r41.34
IN-PI55TATPRPGPB [mm]
  rrect60% 1.8x1.5 smd paste-0.04 mask+0.06: 1(-2.4,1.6) 2(-2.4,-1.6) 3(2.4,-1.6) 4(2.4,1.6)
  silkscreen extent 2.32,-3.27 2.9,-2.7, body extent -2.5,-2.5 2.5,2.5, height 1.6
IR12-21C/TR8 [mm]
  rrect60% 1.6x1.8 smd paste-0.03: A(0,1.702) C(0,-1.702)
  rrect70% 1x0.6 smd paste-99: ""(0.2,0.002)
  silkscreen extent 1.2,-2.5 1.2,-1.1, body extent -2.29,-1.5 0.2,1.5, height 1
"PESD3V3S4UD - SOT95P275X110-6N" [mm] "SOT23, 6-Leads, Body 2.90x2.75mm, Pitch 0.95mm, IPC Medium Density"
  rrect80% 1.2x0.55 smd paste-0.03 mask+0.085: 1(-1.45,0.95) 2(-1.45,0) 3(-1.45,-0.95) 4(1.45,-0.95) 5(1.45,0) 6(1.45,0.95)
  silkscreen extent -1.63,1.78 -1.38,2.02, body extent -0.85,-1.55 0.85,1.55, height 1.1
PMW3360DM-T2QU [mm]
  oval 1.2x1.4 hole 0.7: 1(0,0) 2(-1.778,0) 3(-3.556,0) 4(-5.334,0) 5(-7.112,0) 6(-8.89,0) 7(-10.668,0) 8(-12.446,0) 9(-13.335,-10.7) 10(-11.557,-10.7) 11(-9.779,-10.7) 12(-8.001,-10.7) 13(-6.223,-10.7) 14(-4.445,-10.7) 15(-2.667,-10.7) 16(-0.889,-10.7)
  rect 0x0 hole 8.6 square unplated: ""(-5.8,-5.35)
  silkscreen extent 1.92,0 3.9,0, body extent -16.06,-14.76 5.09,4.09, height 2.44
PT26-51B/TR8 [mm]
  rrect60% 1.7x1.8 smd paste-0.03: C(0,1.802) E(0,-1.802)
  silkscreen extent 1.2,-2.5 1.2,-1.1, body extent -2.05,-1.6 0.45,1.6, height 1.6
RH100-12.000-16-3030 [mm] "3.2mm x 2.5mm crystal"
  rrect50% 1.4x1.1 smd paste-0.1: 1(-1.1,-0.9) 2(1.1,-0.9) 3(1.1,0.9) 4(-1.1,0.9)
  body extent -1.6,-1.25 1.6,1.25, height 1
"RP2040 - QFN40P700X700X90_HS-57M" [mm] "QFN, 56-Leads, Body 7.00x7.00mm, Pitch 0.40mm, Thermal Pad 3.10x3.10mm, IPC Low Density"
  oval 1x0.2 smd paste-99 mask+0.05: 1(-3.425,2.6) 2(-3.425,2.2) 3(-3.425,1.8) 4(-3.425,1.4) 5(-3.425,1) 6(-3.425,0.6) 7(-3.425,0.2) 8(-3.425,-0.2) 9(-3.425,-0.6) 10(-3.425,-1) 11(-3.425,-1.4) 12(-3.425,-1.8) 13(-3.425,-2.2) 14(-3.425,-2.6) 29(3.425,-2.6) 30(3.425,-2.2) 31(3.425,-1.8) 32(3.425,-1.4) 33(3.425,-1) 34(3.425,-0.6) 35(3.425,-0.2) 36(3.425,0.2) 37(3.425,0.6) 38(3.425,1) 39(3.425,1.4) 40(3.425,1.8) 41(3.425,2.2) 42(3.425,2.6)
  oval 0.2x1 smd paste-99 mask+0.05: 15(-2.6,-3.425) 16(-2.2,-3.425) 17(-1.8,-3.425) 18(-1.4,-3.425) 19(-1,-3.425) 20(-0.6,-3.425) 21(-0.2,-3.425) 22(0.2,-3.425) 23(0.6,-3.425) 24(1,-3.425) 25(1.4,-3.425) 26(1.8,-3.425) 27(2.2,-3.425) 28(2.6,-3.425) 43(2.6,3.425) 44(2.2,3.425) 45(1.8,3.425) 46(1.4,3.425) 47(1,3.425) 48(0.6,3.425) 49(0.2,3.425) 50(-0.2,3.425) 51(-0.6,3.425) 52(-1,3.425) 53(-1.4,3.425) 54(-1.8,3.425) 55(-2.2,3.425) 56(-2.6,3.425)
  rrect20% 3.3x3.3 smd paste-99: 57(0,0)
  silkscreen extent -4.42,-3.65 3.65,3.65, body extent -3.5,-3.5 3.5,3.5, height 0.9
SparkGap [mil]
  rect 40x40 smd rot 45 paste-99 mask+4: 1(0,0)
  rect 40x40 smd far side rot 45 paste-99 mask+4: 1(0,0)
"W25Q128JVS - SOIC127P790X216-8M" [mm] "SOIC, 8-Leads, Body 5.28x5.28mm, Pitch 1.27mm, IPC Low Density"
  oval 1.9x0.65 smd paste-0.05: 1(-3.65,1.905) 2(-3.65,0.635) 3(-3.65,-0.635) 4(-3.65,-1.905) 5(3.65,-1.905) 6(3.65,-0.635) 7(3.65,0.635) 8(3.65,1.905)
  silkscreen extent -3.05,-2.7 2.3,3.17, body extent -2.7,-2.7 2.7,2.7, height 2.16

## Part data
BTN.SW.3 BTN.SW.4 BTN.SW.6 BTN.SW.8 LBS.SW.1 LBS.SW.2: "Compact Surface-mounting Switch for long durability", Supplier Part Number 1=Z4378CT-ND, Supplier 1=Digi-Key, Supplier 2=Mouser, Supplier Part Number 2=653-D2LS-21
LED.C.20 LED.C.23 MOS.C.11: library part "Cap 0.1uF 100V", "0805, X5R or better", Supplier Part Number 1=1276-6840-2-ND, Supplier 1=Digi-Key
  MOS.C.11: PNP-A=0, PNP-da=0, PNP-dx=0, PNP-dy=0, PNP-FeedType=Tape, PNP-Level=1, PNP-Lv=1, PNP-Nzl=2, PNP-PlacePriority=1, PNP-Pt=0, PNP-TapeIndex=1, PNP-TapeWidth=8, PNP-Thk=1.05, PNP-TS=70, PNP-Type=chi, PNP-Voff=0, PNP-W=0, PNP-X=2.00, PNP-Y=1.25
LED.D.1 LED.D.3: "ADDRESS LED DISCRETE SERIAL RGB", Supplier Part Number 1=1830-1204-1-ND, Supplier 1=Digi-Key, Supplier 2=Arrow, Supplier 3=Mouser, Supplier Part Number 2=IN-PI55TATPRPGPB, Supplier Part Number 3=743-IN-PI55TATPRPGPB
LED.R.9 LED.R.16 MCU.R.8 MCU.R.11 SCW.R.2 SCW.R.4: library part "Res 1k 1% 0805", "Chip resistor, 1/8W 100PPM", Supplier Part Number 1=RMCF0805FT1K00TR-ND, Supplier 1=Digi-Key
  SCW.R.2 SCW.R.4: PNP-A=0, PNP-da=0, PNP-dx=0, PNP-dy=0, PNP-FeedType=Tape, PNP-Level=1, PNP-Lv=1, PNP-Nzl=2, PNP-PlacePriority=1, PNP-Pt=0, PNP-TapeIndex=1, PNP-TapeWidth=8, PNP-Thk=0.55, PNP-TS=70, PNP-Type=chi, PNP-Voff=0, PNP-W=0, PNP-X=2.00, PNP-Y=1.25
MCH.FID.1 MCH.FID.2: library part FIDUCIAL_1.5, PNP-A=1, PNP-da=0, PNP-dx=0, PNP-dy=0, PNP-FeedType=Fiducial, PNP-Level=1, PNP-Lv=1, PNP-Nzl=2, PNP-PlacePriority=0, PNP-Pt=0, PNP-TapeIndex=0, PNP-TapeWidth=0, PNP-Thk=1.02, PNP-TS=70, PNP-Type=MARK1, PNP-Voff=0, PNP-W=0, PNP-X=4, PNP-Y=4
MCH.FID.3 MCH.FID.4: library part FIDUCIAL_NEW, "This fiducial is designed to work with OpenPNP. It presents a circular pattern under the solder mask, to prevent glare issues from messing with the detection.", PNP-A=1, PNP-da=0, PNP-dx=0, PNP-dy=0, PNP-FeedType=Fiducial, PNP-Level=1, PNP-Lv=1, PNP-Nzl=2, PNP-PlacePriority=0, PNP-Pt=0, PNP-TapeIndex=0, PNP-TapeWidth=0, PNP-Thk=1.02, PNP-TS=70, PNP-Type=MARK1, PNP-Voff=0, PNP-W=0, PNP-X=4, PNP-Y=4
MCH.LOGO.2: library part CoordinateSystem
MCH.SP.1 MCH.SP.2 MCH.SP.3 MCH.SP.4 MCH.SP.5 MCH.SP.6 MCH.SP.7 MCH.SP.8 MCH.SP.9 MCH.SP.10 MCH.SP.11 MCH.SP.12 MCH.SP.13 MCH.SP.14 MCH.SP.15 MCH.SP.16 MCH.SP.17 MCH.SP.18 MCH.SP.19 MCH.SP.20 MCH.SP.21 MCH.SP.22 MCH.SP.23 MCH.SP.24 MCH.SP.25 MCH.SP.26 MCH.SP.27 MCH.SP.28: "Open square pad for spark gapping", PNP-A=0, PNP-da=0, PNP-dx=0, PNP-dy=0, PNP-FeedType=Tape, PNP-Level=1, PNP-Lv=1, PNP-Nzl=2, PNP-PlacePriority=1, PNP-Pt=0, PNP-TapeIndex=1, PNP-TapeWidth=8, PNP-Thk=1, PNP-TS=70, PNP-Type=CHI, PNP-Voff=0, PNP-W=0, PNP-X=1, PNP-Y=1
MCU.C.1 MCU.C.3 MCU.C.4 MCU.C.5 MCU.C.6 MCU.C.7 MCU.C.8 MCU.C.19 MCU.C.21: library part "Cap 0.1uF 25V", "0603, X5R or better", Supplier Part Number 1=1276-6840-2-ND, Supplier 1=Digi-Key
MCU.C.2 MCU.C.9 REG.C.12 REG.C.14 REG.C.16 REG.C.18: library part "Cap 1uF 25V", "0805, X5R or better", Supplier Part Number 1=1276-1066-2-ND, Supplier 1=Digi-Key, Supplier 2=Digi-Key, Supplier Part Number 2=1276-1066-1-ND
  REG.C.12 REG.C.14 REG.C.16 REG.C.18: PNP-A=0, PNP-da=0, PNP-dx=0, PNP-dy=0, PNP-FeedType=Tape, PNP-Level=1, PNP-Lv=1, PNP-Nzl=2, PNP-PlacePriority=1, PNP-Pt=0, PNP-TapeIndex=1, PNP-TapeWidth=8, PNP-Thk=1.25, PNP-TS=70, PNP-Type=chi, PNP-Voff=0, PNP-W=0, PNP-X=2.00, PNP-Y=1.25
MCU.J.1: "2-pin 0.100\" header", Supplier Part Number 1=855-M20-9990245, Supplier 1=Mouser, Supplier 2=Digi-Key, Supplier Part Number 2=952-2261-ND
MCU.R.10 MOS.R.5: library part "Res 10k 1% 0805", "Chip resistor", Supplier Part Number 1=RMCF0805FT10K0TR-ND, Supplier 1=Digi-Key
  MOS.R.5: PNP-A=0, PNP-da=0, PNP-dx=0, PNP-dy=0, PNP-FeedType=Tape, PNP-Level=1, PNP-Lv=1, PNP-Nzl=2, PNP-PlacePriority=1, PNP-Pt=0, PNP-TapeIndex=1, PNP-TapeWidth=8, PNP-Thk=0.55, PNP-TS=70, PNP-Type=chi, PNP-Voff=0, PNP-W=0, PNP-X=2.00, PNP-Y=1.25
MCU.U.1: Supplier Part Number 1=W25Q16JVSSIQ-ND, Supplier 1=Digi-Key
MCU.U.5: Supplier Part Number 1=49AJ8740, Supplier 1=Newark
MCU.Y.1: "12MHz Crystal 16pF 100 Ohms 4-SMD, No Lead (3.2mm x 2.5mm)", Supplier Part Number 1=XC2686CT-ND, Supplier 1=Digi-Key, Supplier 2=Mouser, Supplier Part Number 2=520-160-12-30B-AGMT
MOS.C.10 REG.C.13 REG.C.17: library part "Cap 10uF 25V", "0805, X5R or better", Supplier Part Number 1=81-GRM21BR61E106KA3L, PNP-A=0, PNP-da=0, PNP-dx=0, PNP-dy=0, PNP-FeedType=Tape, PNP-Level=1, PNP-Lv=1, PNP-Nzl=2, PNP-PlacePriority=1, PNP-Pt=0, PNP-TapeIndex=1, PNP-TapeWidth=8, PNP-Thk=1.25, PNP-TS=70, PNP-Type=chi, PNP-Voff=0, PNP-W=0, PNP-X=2.00, PNP-Y=1.25, Supplier 1=Mouser, Supplier 2=Digi-Key, Supplier Part Number 2=490-5523-1-ND
MOS.R.3 MOS.R.4 USB.R.6 USB.R.7: library part "Res 22R 1% 0805", "Chip resistor", Supplier Part Number 1=RMCF0805FT22R0CT-ND, PNP-A=0, PNP-da=0, PNP-dx=0, PNP-dy=0, PNP-FeedType=Tape, PNP-Level=1, PNP-Lv=1, PNP-Nzl=2, PNP-PlacePriority=1, PNP-Pt=0, PNP-TapeIndex=1, PNP-TapeWidth=8, PNP-Thk=0.55, PNP-TS=70, PNP-Type=chi, PNP-Voff=0, PNP-W=0, PNP-X=2.00, PNP-Y=1.25, Supplier 1=Digi-Key, Supplier 2=Arrow, Supplier Part Number 2=RMCF0805FT22R0
MOS.U.2: "Optical Gaming Navigation Sensor", PNP-A=0, PNP-da=0, PNP-dx=0, PNP-dy=0, PNP-FeedType=Tape, PNP-Level=1.3, PNP-Lv=26, PNP-Nzl=4, PNP-PlacePriority=3, PNP-Pt=0, PNP-TapeIndex=2, PNP-TapeWidth=12, PNP-Thk=1.45, PNP-TS=70, PNP-Type=QFP, PNP-Voff=0, PNP-W=0.1, PNP-X=4.9, PNP-Y=3.9
REG.U.3: "3.3V 150mA LDO regulator", Supplier Part Number 1=621-AP2202K-3.3TRG1, PNP-A=90, PNP-da=0, PNP-dx=0, PNP-dy=0, PNP-FeedType=Tape, PNP-Level=1, PNP-Lv=26, PNP-Nzl=2, PNP-PlacePriority=3, PNP-Pt=0, PNP-TapeIndex=1, PNP-TapeWidth=8, PNP-Thk=1, PNP-TS=90, PNP-Type=CHP, PNP-Voff=0, PNP-W=0, PNP-X=2.9, PNP-Y=1.3, Supplier 1=Mouser, Supplier 2=Digi-Key, Supplier 3=Arrow, Supplier Part Number 2=AP2202K-3.3TRG1DICT-ND, Supplier Part Number 3=PWagzdsTFFHKE_U17B45SP-NtndBrheJIaI5hB7gHD0ZVywxIBNyoAQstvnyfZZ0
REG.U.4: "Linear Voltage Regulator IC 1 Output 150mA SOT-23-5", Supplier Part Number 1=AP2204K-1.8TRG1DICT-ND, PNP-A=90, PNP-da=0, PNP-dx=0, PNP-dy=0, PNP-FeedType=Tape, PNP-Level=1, PNP-Lv=26, PNP-Nzl=2, PNP-PlacePriority=3, PNP-Pt=0, PNP-TapeIndex=1, PNP-TapeWidth=8, PNP-Thk=1, PNP-TS=90, PNP-Type=CHP, PNP-Voff=0, PNP-W=0, PNP-X=2.9, PNP-Y=1.3, Supplier 1=Digi-Key, Supplier 2=Mouser, Supplier Part Number 2=621-AP2204K-1.8TRG1
SCW.D.11 SCW.D.12: library part IR12-21C/TR8, "Infrared (IR) Emitter 880nm 1.3V 50mA 1mW/sr @ 20mA 30° 2-SMD, No Lead", Supplier Part Number 1=1080-1351-1-ND, Supplier 1=Digi-Key, Supplier 2=Mouser, Supplier 3=Digi-Key, Supplier 4=Mouser, Supplier 5=Arrow, Supplier Part Number 2=638-IR12-21C, Supplier Part Number 3=VSMB10940CT-ND, Supplier Part Number 4=78-VSMB10940, Supplier Part Number 5=VSMB10940
SCW.Qt.1 SCW.Qt.2: library part PT26-51B/TR8, "Phototransistor 940nm Side View 1206 (3216 Metric)", Supplier Part Number 1=1080-1387-1-ND, Supplier 1=Digi-Key, Supplier 2=Digi-Key, Supplier Part Number 2=1080-1377-1-ND
SCW.R.1 SCW.R.3: library part "Res 100R 1% 0805", "Chip resistor", Supplier Part Number 1=RMCF0805FT100RCT-ND, PNP-A=0, PNP-da=0, PNP-dx=0, PNP-dy=0, PNP-FeedType=Tape, PNP-Level=1, PNP-Lv=1, PNP-Nzl=2, PNP-PlacePriority=1, PNP-Pt=0, PNP-TapeIndex=1, PNP-TapeWidth=8, PNP-Thk=0.55, PNP-TS=70, PNP-Type=chi, PNP-Voff=0, PNP-W=0, PNP-X=2.00, PNP-Y=1.25, Supplier 1=Digi-Key, Supplier 2=Digi-Key, Supplier Part Number 2=RMCF0805FT100RTR-ND
USB.FB.1 USB.FB.2 USB.FB.3: "FERRITE BEAD 600 OHM 0805 1LN", Supplier Part Number 1=535-12556-1-ND, PNP-A=0, PNP-da=0, PNP-dx=0, PNP-dy=0, PNP-FeedType=Tape, PNP-Level=1, PNP-Lv=1, PNP-Nzl=2, PNP-PlacePriority=1, PNP-Pt=0, PNP-TapeIndex=1, PNP-TapeWidth=8, PNP-Thk=0.55, PNP-TS=70, PNP-Type=chi, PNP-Voff=0, PNP-W=0, PNP-X=2.00, PNP-Y=1.25, Supplier 1=Digi-Key
USB.J.3: "USB-C (USB TYPE-C) USB 2.0 Receptacle Connector 24 (16+8 Dummy) Position Surface Mount, Right Angle; Through Hole", Supplier Part Number 1=670-DX07S016JA1R1500CT-ND, Supplier 1=Digi-Key, Supplier 2=Mouser, Supplier Part Number 2=656-DX07S016JA1R1500
USB.Ra.1: library part "Quad Res 10k 1% 1206", "Chip resistor"
USB.Z.1: "TVS DIODE 5.5V 6TSOP (Low capacitance, USB)", PNP-A=270, PNP-da=0, PNP-dx=0, PNP-dy=0, PNP-FeedType=Tape, PNP-Level=1, PNP-Lv=26, PNP-Nzl=2, PNP-PlacePriority=3, PNP-Pt=0, PNP-TapeIndex=1, PNP-TapeWidth=8, PNP-Thk=1, PNP-TS=90, PNP-Type=CHP, PNP-Voff=0, PNP-W=0, PNP-X=2.9, PNP-Y=1.3

## Free pads (board coordinates)
  round 0 hole 2.6: ""(3.6,-50.8) ""(87.8,-37.4) ""(93,-13.8)

## Via types
v1: diameter 0.8, hole 0.4, Top Layer to Bottom Layer, tented both sides, 188 vias
v2: diameter 1.016, hole 0.508, Top Layer to Bottom Layer, tented both sides, 28 vias
v3: diameter 0.7, hole 0.3, Top Layer to Bottom Layer, tented both sides, 28 vias
v4: diameter 0.45, hole 0.45, Top Layer to Bottom Layer, tented both sides, 8 vias
v5: diameter 0.6, hole 0.6, Top Layer to Bottom Layer, tented both sides, 4 vias
v6: diameter 0.6, hole 0.3, Top Layer to Bottom Layer, tented both sides, 1 vias

## Nets (pads, with @x,y where several pads share a name; then routed paths per layer and width w, separated by ;. In a path a pad name is that pad's centre, name@x,y a point inside that pad or via, vN(x,y) a via of type N, cw(c..) or ccw(c..) an arc to the next point about the centre after c; other vN are vias at no path point)
1V1: MCU.C.9.2 MCU.C.19.2 MCU.C.21.2 MCU.U.5.23 MCU.U.5.45 MCU.U.5.50 | length 27.9
  Top Layer w0.2: MCU.C.9.2@17.544,-38.156 18.7,-37 20.454,-37 MCU.U.5.45@20.905,-36.549 ; MCU.C.21.2@20.001,-40.699 20.001,-40.282 MCU.U.5.50@22.32,-37.963 ; MCU.C.19.2@26.199,-28.501 26.199,-28.799 v3@26.9,-29.5 ; MCU.U.5.23@26.598,-32.554 26.981,-32.171 ccw(c26.21,-31.4) 27.3,-31.4 27.3,-30.466 ccw(c25.934,-30.466) v3@26.901,-29.501
  Top Layer w0.4: MCU.C.9.2@17.544,-38.156 17.9,-38.512 17.9,-39.8 18.799,-40.699 MCU.C.21.2@20.001,-40.699
  Plane 2 w0.35: v3(18.8,-37.4) cw(c20.007,-37.4) 19.153,-36.547 24.259,-31.441 cw(c24.6,-31.783) 24.6,-31.3 ccw(c24.6,-30.334) 25.283,-31.017 26.529,-29.771 cw(c26.7,-29.941) v3(26.7,-29.7)
1V8: MOS.R.3.2 MOS.U.2.4 REG.C.17.2 REG.C.18.2 REG.U.4.5 | length 43.6
  Top Layer w0.5: REG.C.17.2@21.6,-10.898 ccw(c21.847,-10.65) 21.847,-11 24.645,-11 ; MOS.R.3.2@26.7,-9.998 26.442,-10.256 cw(c24.645,-8.46) 24.645,-11 ; v1(31.3,4.4) 32.148,4.4 cw(c32.148,1.86) 33.944,3.656 34.856,2.744 cw(c33.06,0.948) 35.6,0.948 35.6,-6.548 cw(c31.611,-6.548) 35.302,-8.06 cw(c34.84,-7.87) 35.195,-8.222 34.85,-8.567 ccw(c35.182,-8.9) 34.712,-8.888 cw(c34.212,-8.873) 34.585,-9.207 cw(c31.611,-6.548) 34.433,-9.367 cw(c31.611,-6.548) 34.432,-9.368 33.968,-9.832 cw(c31.148,-7.011) 31.146,-11 24.645,-11
  Top Layer w0.6: REG.C.18.2@18.902,-9 18.906,-9.004 cw(c17.11,-10.8) 19.65,-10.8 REG.U.4.5@19.65,-10.85 21.485,-10.85 cw(c21.485,-11.013) REG.C.17.2@21.6,-10.898
  Plane 2 w0.5: MOS.U.2.4@25.034,2.6 25.034,2.716 cw(c25.901,2.716) 25.287,3.329 cw(c26.425,2.191) 26.426,3.8 26.427,3.8 29.851,3.8 ccw(c29.851,5.849) v1(31.3,4.4)
3V3: MCU.C.1.2 MCU.C.2.2 MCU.C.3.2 MCU.C.4.2 MCU.C.5.2 MCU.C.6.2 MCU.C.7.2 MCU.C.8.2 MCU.R.10.1 MCU.U.1.8 MCU.U.5.1 MCU.U.5.10 MCU.U.5.22 MCU.U.5.26 MCU.U.5.33 MCU.U.5.42 MCU.U.5.43 MCU.U.5.44 MCU.U.5.48 MCU.U.5.49 MOS.R.5.2 MOS.U.2.5 REG.C.13.2 REG.C.14.2 REG.U.3.5 SCW.Qt.1.C SCW.Qt.2.C SCW.R.1.2 SCW.R.3.2 | length 262.6
  Top Layer w0.2: MCU.C.2.2@17.744,-33.344 MCU.C.2.2@17.744,-33.156 ; MCU.C.8.2@18.044,-35.5 MCU.C.8.2@18.3,-35.5 ; v1(19.1,-34.7) 19.778,-35.378 ; MCU.C.6.2@20.815,-30.201 MCU.U.5.33@22.885,-32.271 ; MCU.U.5.48@21.754,-37.398 20.251,-38.9 19.8,-38.9 v1(19.6,-39.1) 19.8,-39.3 20.417,-39.3 MCU.U.5.49@22.037,-37.68 ; v3(26.6,-30.7) 26.6,-30.854 MCU.U.5.26@25.749,-31.705 25.3,-32.154 25.3,-32.5 26.1,-33.3 26.417,-33.3 MCU.U.5.22@26.88,-32.837 27.34,-32.377 ; 27.341,-32.376 ccw(c26.472,-31.509) 27.7,-31.509 27.7,-31 ; MCU.C.5.2@27.699,-29.101 27.7,-29.102 27.7,-31 ; MCU.U.5.10@27.729,-37.115 28.514,-37.9 28.7,-37.9 30.099,-39.299 MCU.C.4.2@30.199,-39.299 ; v1(28.5,-30.2) 27.7,-31 ; MCU.C.8.2@18.3,-35.5 MCU.C.8.2@18.5,-35.5 ; MCU.C.8.2@18.3,-35.5 19.4,-36.6 20.289,-36.6 MCU.U.5.44@20.623,-36.266 MCU.U.5.43@20.34,-35.983 ; MCU.C.8.2@18.3,-35.5 18.101,-35.301 MCU.C.8.2@18.101,-35.299 18.299,-35.299 MCU.C.8.2@18.5,-35.5 ; MCU.C.8.2@18.5,-35.5 19.656,-35.5 19.778,-35.378 ; MCU.C.8.2@18.5,-35.5 18.983,-35.983 MCU.U.5.43@20.34,-35.983 ; 19.778,-35.378 MCU.U.5.42@20.34,-34.817 ; 19.778,-35.378 20.34,-35.94 MCU.U.5.43@20.34,-35.983 ; MCU.U.5.43@20.34,-35.983 20.7,-35.623 20.7,-35.177 MCU.U.5.42@20.34,-34.817 ; MCU.U.5.42@20.34,-34.817 19.405,-34.817 18.101,-33.513 17.944,-33.356 18.879,-33.356 MCU.U.5.42@20.34,-34.817 ; v1(24.5,-40.8) cw(c24.5,-42.49) 25.695,-41.295 MCU.C.3.2@25.699,-41.299 25.699,-40.176 MCU.U.5.1@25.183,-39.66 24.664,-40.18 24.664,-40.636 v1(24.5,-40.8)
  Top Layer w0.6: v1(31.5,-39.2) 34.345,-39.2 ccw(c34.345,-36.66) 36.142,-38.456 36.554,-38.044 cw(c38.35,-39.84) 38.35,-37.3 SCW.R.3.2@52.198,-37.3 SCW.R.1.2@52.198,-35 52.198,-22.954 52.198,-22.951 cw(c61.421,-22.951) 54.883,-16.446 cw(c61.421,-22.951) 54.897,-16.431 cw(c59.763,-20.62) 59.763,-14.2 59.81,-14.2 59.811,-14.2 ccw(c59.812,-7.14) 64.433,-12.477 cw(c64.827,-12.931) 64.441,-12.471 64.443,-12.471 SCW.Qt.2.C@64.804,-12.132 65.071,-11.866 cw(c69.09,-15.882) 69.09,-10.2 70.052,-10.2 70.054,-10.2 cw(c70.055,-14.407) 72.682,-11.121 SCW.Qt.1.C@73.029,-11.432
  Top Layer w0.65: v1(16.7,-50) 17.595,-49.105 MCU.U.1.8@17.65,-49.105 MCU.C.1.2@17.65,-51
  Top Layer w0.7: MCU.C.6.2@20.801,-30.201 20.815,-30.201 20.899,-30.201 20.899,-30.101 v3(21.4,-29.6) ; MOS.R.5.2@29.809,-43.009 ccw(c29.589,-42.789) 29.9,-42.789 v1(29.9,-41.5) ; MCU.C.4.2@30.199,-39.299 cw(c30.438,-39.538) 30.438,-39.2 v1(31.5,-39.2)
  Top Layer w0.8: MCU.C.2.2@17.744,-33.344 18.101,-33.701 v1(19.1,-34.7) 18.501,-35.299 MCU.C.8.2@18.299,-35.299 ; MCU.C.7.2@19.001,-39.699 v1(19.6,-39.1) ; v1(26.4,-50.4) 26.402,-50.402 MCU.R.10.1@27.8,-50.402
  Top Layer w0.9: MCU.C.2.2@17.744,-33.156 MCU.C.2.2@17.944,-33.356 ; MCU.C.8.2@18.101,-35.299 18.101,-33.701 MCU.C.2.2@18.101,-33.513
  Bottom Layer w0.7: v3(15.5,-41.2) 3.293,-41.2 cw(c3.291,-35.371) -0.826,-39.497 cw(c3.042,-35.633) -2.425,-35.551 cw(c0.65,-35.55) 0.65,-32.475 0.652,-32.475 6.6,-32.475 ccw(c6.6,-30) 8.35,-31.75 8.376,-31.724 ccw(c7.351,-30.7) 8.8,-30.7 ccw(c7.05,-30.7) 8.287,-29.462 8.275,-29.45 ccw(c7.008,-30.717) 7.008,-28.925 0.776,-28.925 cw(c0.774,-25.548) -1.614,-27.937 cw(c0.289,-26.033) -2.402,-26.031 ccw(c-3.102,-26.032) -2.403,-26.013 -2.403,-26.011 cw(c0.642,-25.921) 0.643,-22.875 0.645,-22.875 6.887,-22.875 ccw(c6.887,-20.912) 8.275,-22.3 ccw(c7.128,-21.153) 8.75,-21.153 8.75,-21.125 ccw(c6.879,-21.125) 8.202,-19.802 8.15,-19.75 ccw(c7.124,-20.776) 7.124,-19.325 0.659,-19.325 cw(c0.656,-16.21) -1.546,-18.413 cw(c0.547,-16.32) -2.413,-16.32 cw(c0.463,-16.32) -1.569,-14.285 cw(c0.811,-16.669) 0.811,-13.3 6.897,-13.3 ccw(c6.897,-11.422) 8.225,-12.75 8.28,-12.695 ccw(c7.085,-11.5) 8.775,-11.5 ccw(c6.904,-11.5) 8.227,-10.177 8.175,-10.125 ccw(c7.209,-11.091) 7.209,-9.725 0.415,-9.725 cw(c0.412,-6.91) -1.579,-8.9 cw(c0.683,-6.638) -2.515,-6.635 cw(c0.262,-6.637) -1.704,-4.675 cw(c0.649,-7.024) 0.649,-3.7 6.851,-3.7 ccw(c6.851,-1.651) 8.3,-3.1 8.305,-3.095 ccw(c7.11,-1.9) 8.8,-1.9 8.8,-1.569 8.8,-1.567 cw(c12.844,-1.567) 9.984,1.293 cw(c16.763,-5.488) 16.764,4.1 16.765,4.1 25.174,4.1 cw(c25.174,2.649) 26.2,3.675 26.485,3.39 cw(c25.694,2.6) MOS.U.2.5@26.812,2.6
  other v1: 23,-26.5 24.5,-26.5 23,-25 24.5,-25
GND: BTN.SW.3.B BTN.SW.4.B BTN.SW.6.B BTN.SW.8.A LBS.SW.1.B LBS.SW.2.A LED.C.20.1 LED.C.23.1 LED.D.1.3 LED.D.3.3 MCH.SP.1.1 MCH.SP.2.1 MCH.SP.3.1 MCH.SP.4.1 MCH.SP.5.1 MCH.SP.6.1 MCH.SP.7.1 MCH.SP.8.1 MCH.SP.9.1 MCH.SP.10.1 MCH.SP.11.1 MCH.SP.12.1 MCH.SP.13.1 MCH.SP.14.1 MCH.SP.15.1 MCH.SP.16.1 MCH.SP.17.1 MCH.SP.18.1 MCH.SP.19.1 MCH.SP.20.1 MCH.SP.21.1 MCH.SP.22.1 MCH.SP.23.1 MCH.SP.24.1 MCH.SP.25.1 MCH.SP.26.1 MCH.SP.27.1 MCH.SP.28.1 MCU.C.1.1 MCU.C.2.1 MCU.C.3.1 MCU.C.4.1 MCU.C.5.1 MCU.C.6.1 MCU.C.7.1 MCU.C.8.1 MCU.C.9.1 MCU.C.19.1 MCU.C.21.1 MCU.J.1.1 MCU.U.1.4 MCU.U.5.3 MCU.U.5.5 MCU.U.5.6 MCU.U.5.8 MCU.U.5.11 MCU.U.5.13 MCU.U.5.14 MCU.U.5.17 MCU.U.5.19 MCU.U.5.29 MCU.U.5.31 MCU.U.5.34 MCU.U.5.36 MCU.U.5.37 MCU.U.5.39 MCU.U.5.41 MCU.U.5.57 MCU.Y.1.2 MCU.Y.1.4 MOS.C.10.1 MOS.C.11.1 MOS.U.2.8 REG.C.12.1 REG.C.13.1 REG.C.14.1 REG.C.16.1 REG.C.17.1 REG.C.18.1 REG.U.3.2 REG.U.4.2 SCW.D.11.C SCW.D.12.C SCW.R.2.1 SCW.R.4.1 USB.J.3.1 USB.J.3.12 USB.J.3.SHELL USB.Ra.1.1 USB.Ra.1.2 USB.Ra.1.3 USB.Ra.1.4 USB.Z.1.2
  other v1: 14.6,-54.2 25.6,-52.7 -0.5,-51 20.6,-50.9 19.4,-49.6 53.3,-49 33.8,-48.6 15.7,-48 11.5,-47.9 20.8,-47.8 23.2,-47.8 5.9,-47.5 -0.5,-45.5 22.9,-45.4 31.3,-44.4 11.6,-44.3 25,-44.3 15.9,-44.2 6.6,-44.1 69.4,-44 27.6,-43.2 61.4,-42.8 4.4,-42.3 9.5,-42.3 70.4,-42.2 20.03,-41.93 65.4,-41.8 50.7,-41.7 16.9,-41.6 59.1,-41.4 32.2,-41.2 37.7,-40.7 78.9,-40.4 43.7,-39.7 49.7,-39.5 56.8,-39.5 70.2,-39.5 24.6,-38.3 73.8,-38.3 15.8,-37.5 1.6,-37.2 8.6,-37.2 32.4,-36.7 50.2,-35.9 21.7,-35.4 27.5,-35.4 15.1,-35.3 47.1,-35.3 57,-34.6 38.1,-34.4 32.1,-33.9 33.7,-33.9 64.9,-33.4 16.1,-33 43.9,-33 73.4,-32.8 24.3,-32.5 35.4,-32.5 30.5,-32.2 38.7,-32 58.4,-31.6 74.9,-31.2 84,-31 79.9,-30.7 35.2,-30.5 49.8,-30.4 16.9,-29.9 35,-29 33.1,-28.6 13.6,-28.2 18.7,-28.2 56.6,-27.9 87.4,-27.4 29.7,-27.1 28.2,-26.5 37.3,-26.2 26.2,-24.9 18.3,-24.8 90.3,-24 13.7,-22.6 20.6,-22.2 25,-21.6 30.7,-21.6 16.2,-21.5 37.8,-21.4 55.9,-20.7 87.1,-20.4 27.9,-20 25.8,-19.9 23.8,-19.8 34.6,-19.3 49.8,-19.2 19.3,-18.6 89.2,-17.3 23.2,-17 56,-16.7 42.2,-16.4 36.1,-16.3 52.8,-14.6 47.7,-14.5 86.2,-14.1 64.3,-13.9 23.2,-13.4 26.3,-13.4 70.9,-13.2 40,-12.9 78.5,-12.5 82.3,-12.2 18.3,-11.8 89.7,-11.8 87.1,-11.3 49.9,-10.6 56.1,-10.2 30.6,-9.9 13.4,-9.3 79.8,-9.3 73.7,-9.1 91.7,-8.5 83,-8.1 87.2,-8.1 88.8,-8.1 17.9,-7.9 66.3,-7.8 45.5,-7.4 51.9,-6.5 42.5,-5.9 85.9,-5.9 36.5,-5.2 59.8,-5 64.3,-5 69.5,-4.6 74.9,-4 13.4,-3.7 79.9,-3.6 47.8,-3.2 84.2,-2.5 87.5,-2.5 52.2,-1.5 81.1,-0.7 6.6,-0.2 36.5,-0.2 -0.9,0.4 15.3,1.2 58.4,2.5 18,2.6 87.2,2.6 69.8,2.8 72.4,2.9 -0.9,4.4 54.9,4.4 29.6,4.7 6.6,4.8 9.7,4.8 88.1,5.9 75.6,6.7
  other v2: 8.6,-53.7 19.6,-53.7 31.6,-53.7 0.2,-53.5 50.756,-51.465 36.9,-51.4 -0.7,-47.5 72.2,-47.1 36.8,-45.5 49.5,-44.6 73.7,-42.1 86,-41.7 91,-35.5 93,-28.9 50.3,-24.1 93.8,-21.8 15.9,-17.6 26,-17.2 92.9,-16.9 35.1,-11.4 41,-9.3 93.6,-9 35.9,-8.9 41.3,-2.3 59.4,-1.2 35.3,3.8 90.9,4.7 58.633,5.489
LEDData: LED.R.16.2 MCU.U.5.15 | length 15
  Top Layer w0.2: MCU.U.5.15@28.86,-34.817 ccw(c30.269,-33.408) 29.093,-35.016 ccw(c30.269,-33.408) 30.269,-35.4 v3(31.5,-35.4)
  Top Layer w0.4: v1(40,-39.8) 41.898,-39.8 LED.R.16.2@41.9,-39.798
  Bottom Layer w0.4: v3(31.5,-35.4) 34.634,-35.4 cw(c34.634,-38.214) 36.624,-36.224 39.859,-39.459 cw(c39.517,-39.8) v1(40,-39.8)
NetBTN.SW.3_A: BTN.SW.3.A MCU.U.5.30 | length 52.4
  Top Layer w0.2: v3(23.3,-29.9) 23.3,-30.989 MCU.U.5.30@23.734,-31.423
  Top Layer w0.4: v1(47.4,-41.4) 47.848,-41.4 cw(c47.848,-43.94) 49.644,-42.144 50.1,-42.6 ccw(c50.824,-41.876) 50.824,-42.9 56.734,-42.9 cw(c56.734,-44.266) 57.7,-43.3 ccw(c59.149,-41.851) 59.149,-43.9 62.248,-43.9 cw(c62.248,-46.44) 64.044,-44.644 65.429,-46.029 cw(c63.633,-47.825) 66.173,-47.825 BTN.SW.3.A@66.173,-48.417
  Bottom Layer w0.4: v3(23.3,-29.9) ccw(c24.266,-29.9) 23.583,-30.583 25.256,-32.256 ccw(c27.052,-30.46) 27.052,-33 33.048,-33 cw(c33.048,-36.747) 35.698,-34.098 39.556,-37.956 ccw(c41.352,-36.16) 41.352,-38.7 43.648,-38.7 cw(c43.648,-41.24) 45.444,-39.444 v1(47.4,-41.4)